# Altium PCB PCB1.PcbDoc (part 1 of 2)
Units mm, origin at the board's own origin, x right, y up, seen from the top; angles counter-clockwise.
Board outline 100 x 24 mm, 2 copper layers (Top Layer, Bottom Layer); 70 components, 86 nets, 352 pads, 196 vias.
Unrouted connection lines stored in the file: 3.
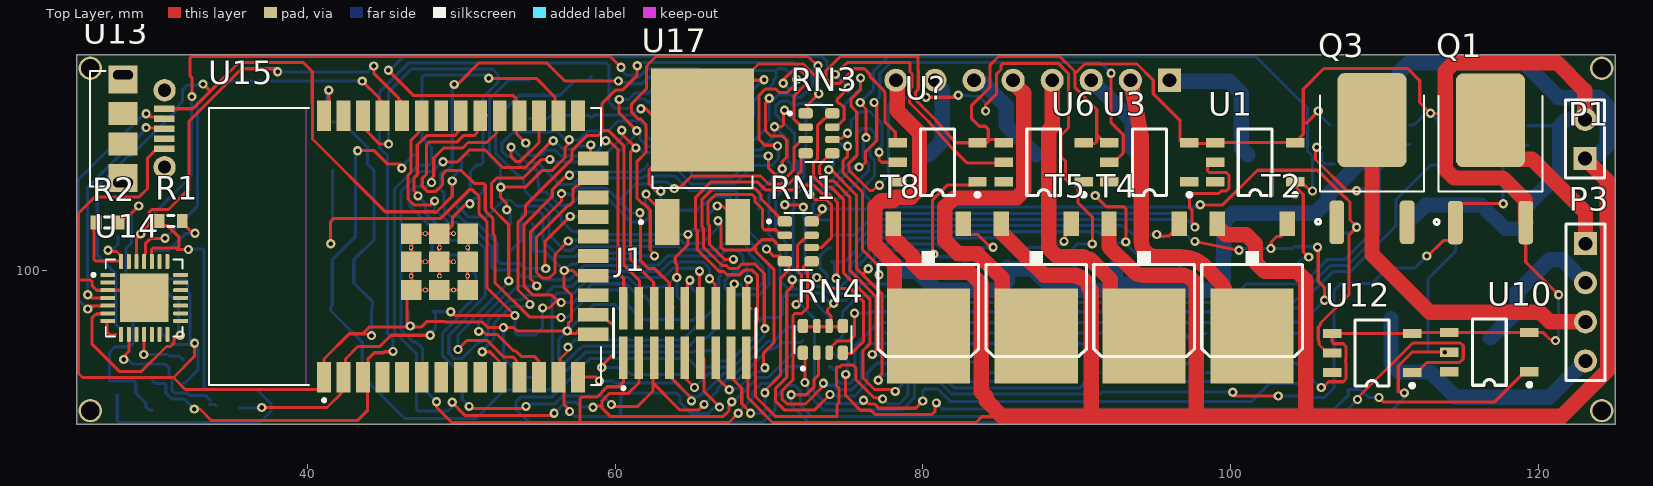
[diagram p0: Top Layer view]
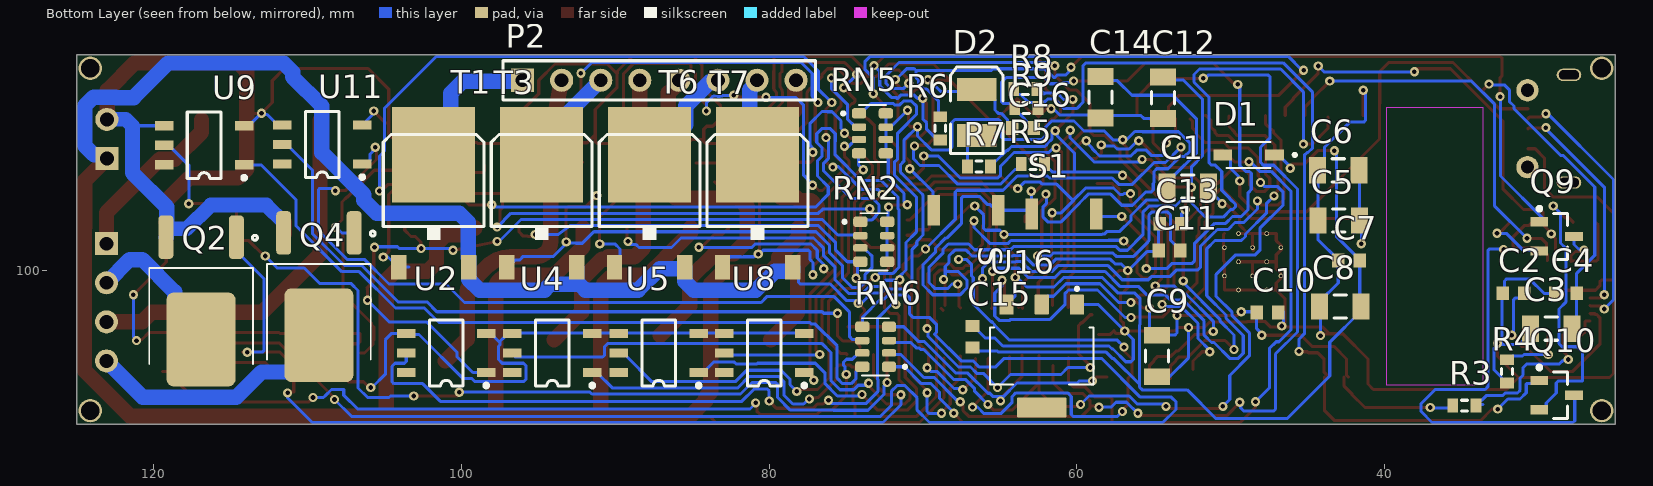
[diagram p1: Bottom Layer view, seen from below]

## Layer stack, top to bottom
Top Solder: solder mask 0.0102, Solder Resist, Dk 3.5
Top Layer: signal copper 0.0356
Dielectric 1: dielectric 0.32, FR-4, Dk 4.8
Bottom Layer: signal copper 0.0356
Bottom Solder: solder mask 0.0102, Solder Resist, Dk 3.5

## Board outline
25,114 125,114 125,90 25,90

## Design rules (kind name [scope] priority, off if disabled: settings)
Clearance [All] p1: gap=0.2 ignorepadtopadclearanceinfootprint=FALSE
PolygonConnect [All] p1: connectstyle=Relief reliefconductorwidth=0.254 reliefentries=4 polygonreliefangle="90 Angle" airgapwidth=0.254
RoomDefinition SheetArduinoUSB [InComponentClass('SheetArduinoUSB')] p1: confinementstyle=ConfineIn formatcopy=TRUE lockcomponents=FALSE outline 126,165 192,165 192,180 126,180
RoomDefinition SheetArduinoPNP [InComponentClass('SheetArduinoPNP')] p2: confinementstyle=ConfineIn formatcopy=TRUE lockcomponents=FALSE outline 126,133 263,133 263,164 126,164
RoomDefinition SheetArduinoNPN [InComponentClass('SheetArduinoNPN')] p3: confinementstyle=ConfineIn formatcopy=TRUE lockcomponents=FALSE outline 126,123 269,123 269,164 126,164
RoomDefinition SheetArduinoESP32 [InComponentClass('SheetArduinoESP32')] p4: confinementstyle=ConfineIn formatcopy=TRUE lockcomponents=FALSE outline 126,92 273,92 273,123 126,123
RoutingCorners [All] p1: cornerstyle=45-Degree minsetback=2 maxsetback=2
RoutingVias [All] p1: holewidth=0.3 width=0.6 viastyle="Through Hole" minholewidth=0.3 minwidth=0.6 maxholewidth=0.711 maxwidth=1.27
SMDNeckDown [All] p1: percent=100.000
SolderMaskExpansion [All] p1: expansion=0.102 istentingtop=FALSE
Width [All] p1: maxlimit=1 minlimit=0.2 preferedwidth=0.2 minimp=50.000000 maximp=50.000000 favimp=50.000000
29 further rules are at their usual default settings.

## Classes and differential pairs
component class SheetArduinoUSB: C1 C2 C3 C4 D1 Q9 Q10 R1 R2 R3 R4 U13 U14
component class SheetArduinoPNP: P1 P2 RN1 RN2 RN3 RN5 T1 T2 T3 T4 T5 T6 T7 T8 U1 U2 U3 U4 U5 U6 U8 U?
component class SheetArduinoNPN: P3 Q1 Q2 Q3 Q4 RN4 RN6 U9 U10 U11 U12
component class SheetArduinoESP32: C5 C6 C7 C8 C9 C10 C11 C12 C13 C14 C16 D2 J1 R5 R6 R7 R8 R9 S S1 U15 U16 U17

## Components (designator, comment, footprint, x,y, rotation, side; value= is the part's Value field where it differs from the comment)
C1 "10uF" C1206 52.775,105.45 r0 bottom
C2 "1uF" 1608[0603] 31.6,98.5 r180 bottom
C3 "10uF" C1206 29.15,96.2 r180 bottom
C4 "0.1uF" 1608[0603] 28.2,98.5 r180 bottom
C5 "10uF" C1206 42.975,103.225 r180 bottom
C6 "10uF" C1206 43,106.5 r180 bottom
C7 "0.1uF" 1608[0603] 42.3,100.625 r180 bottom
C8 "10uF" C1206 42.875,97.65 r180 bottom
C9 "10uF" C1206 54.775,94.425 r90 bottom
C10 "0.1uF" 1608[0603] 47.6,97.25 r0 bottom
C11 "0.1uF" 1608[0603] 53.975,101.275 r180 bottom
C12 "10uF" C1206 54.4,111.225 r90 bottom
C13 "0.1uF" 1608[0603] 53.9,103.025 r180 bottom
C14 "10uF" C1206 58.45,111.25 r90 bottom
C15 "0.1uF" 1608[0603] 66.775,95.675 r270 bottom
C16 "0.1uF" 1608[0603] 63.5,109.25 r180 bottom
D1 "1N5819HW-7" SOD3715X145N 48.825,107.5 r0 bottom
D2 "LED" 3.5X2.8X1.9 66.5,110.25 r90 bottom
J1 "FTM-109-02-L-DV" SAMTEC_FTM-109-02-L-DV 64.525,95.917 r0 top
P1 "Header 8" HDR1X2 123.05,107.265 r90 top
P2 "Header 2" HDR1X8 96.025,112.35 r180 bottom
P3 "Header 8" HDR1X4 123.075,101.725 r270 top
Q1 "IRLR120N" DPAK229P990X239-3N 116.9,107.24 r0 top
Q2 "IRLR120N" DPAK229P990X239-3N 116.925,98.01 r0 bottom
Q3 "IRLR120N" DPAK229P990X239-3N 109.194,107.252 r0 top
Q4 "IRLR120N" DPAK229P990X239-3N 109.265,98.285 r0 bottom
Q9 "2SC4213" SOT-23B_N 28.8,102.2 r180 bottom
Q10 "2SC4213" SOT-23B_N 28.8,91.875 r180 bottom
R1 "12K" J1-0603 31.1,103.2 r0 top
R2 "12K" J1-0603 27,103.1 r0 top
R3 "2K" J1-0603 34.8,91.2 r0 bottom
R4 "10K" J1-0603 32.025,93.425 r90 bottom
R5 "12K" J1-0603 62.85,106.9 r180 bottom
R6 "12K" J1-0603 68.875,109.225 r90 bottom
R7 "10K" J1-0603 66.35,106.75 r180 bottom
R8 "12K" J1-0603 63.35,111.775 r180 bottom
R9 "12K" J1-0603 63.275,110.55 r180 bottom
RN1 "EXB-38V330GV" RESCAXS80P320X160X60-8N 71.895,101.875 r0 top
RN2 "EXB-38V330GV" RESCAXS80P320X160X60-8N 73.195,101.85 r180 bottom
RN3 "EXB-38V330GV" RESCAXS80P320X160X60-8N 73.245,108.9 r0 top
RN4 "EXB-38V330GV" RESCAXS80P320X160X60-8N 73.5,95.505 r90 top
RN5 "EXB-38V330GV" RESCAXS80P320X160X60-8N 73.28,108.9 r180 bottom
RN6 "EXB-38V330GV" RESCAXS80P320X160X60-8N 73.07,95.025 r0 bottom
S "SKRKAEE010" SKRK 67.2,103.9 r0 bottom
S1 "SKRKAEE010" SKRK 60.825,103.65 r180 bottom
T1 "IRFR5305" D-PAK_TO252AA 101.805,105 r180 bottom
T2 "IRFR5305" D-PAK_TO252AA 101.405,98.225 r180 top
T3 "IRFR5305" D-PAK_TO252AA 94.783,105 r180 bottom
T4 "IRFR5305" D-PAK_TO252AA 94.38,98.225 r180 top
T5 "IRFR5305" D-PAK_TO252AA 87.367,98.225 r180 top
T6 "IRFR5305" D-PAK_TO252AA 87.767,105 r180 bottom
T7 "IRFR5305" D-PAK_TO252AA 80.75,105 r180 bottom
T8 "IRFR5305" D-PAK_TO252AA 80.35,98.225 r180 top
U1 "4N25" SOP5(6) 101.6,107.02 r90 top
U2 "4N25" SOP5(6) 100.99,94.625 r90 bottom
U3 "4N25" SOP5(6) 94.725,107.02 r90 top
U4 "4N25" SOP5(6) 94.095,94.625 r90 bottom
U5 "4N25" SOP5(6) 87.175,94.625 r90 bottom
U6 "4N25" SOP5(6) 87.85,107.02 r90 top
U8 "4N25" SOP5(6) 80.315,94.625 r90 bottom
U9 "4N25" SOP5(6) 116.725,108.125 r90 bottom
U10 "4N25" SOP5(6) 116.825,94.675 r90 top
U11 "4N25" SOP5(6) 109.05,108.175 r90 bottom
U12 "4N25" SOP5(6) 109.2,94.62 r90 top
U13 "105017-0001" MOLEX_105017-0001 28,109.2 r270 top
U14 "CP2102-GM" QFN50P500X500X100-29N 29.375,98.2 r0 top
U15 "ESP32-WROOM-32" MODULE_ESP32-WROOM-32 46.325,101.55 r90 top
U16 "AMS1117-3.3" SOT229P700X180-4N 62.275,94.42 r0 bottom
U17 "L78M05CDT" VREG_L78M05CDT 65.675,107.375 r90 top
U? "4N25" SOP5(6) 80.95,107.02 r90 top

## Footprints (in the part's own frame and the unit in brackets; to place one, negate y for a bottom-side part, rotate by r counter-clockwise, add the part's x,y. Pads: shape width x height; smd on the part's side, far side on the other; paste and mask are expansions set on the pad)
3.5X2.8X1.9 [mm] "SM LED; 2 C-Bend Leads; Body 3.5 x 2.8 x 1.9 mm, inc leads (LxWxH typ)"
  rect 1.5x2.6 smd: 1(-1.5,0) 2(1.5,0)
  silkscreen extent -2.65,-1.7 2.95,1.7
1608[0603] [mm] "Chip Capacitor, Body 1.6x0.8mm, IPC High Density"
  rect 0.8x0.9 smd: 1(-0.7,0) 2(0.7,0)
  body extent -0.87,-0.48 0.87,0.48, height 1.3
C1206 [mm] "Chip Capacitor, Body 3.2x1.6mm, IPC High Density"
  rect 1.1x1.7 smd: 1(-1.35,0) 2(1.35,0)
  silkscreen extent -0.4,-0.75 0.4,0.75, body extent -1.7,-0.9 1.7,0.9, height 1.3
D-PAK_TO252AA [mm]
  rect 1x1.6 smd: 1(-2.28,-4.8) 3(2.28,-4.8)
  rect 5.4x6.2 smd: 4(0,2.5)
  silkscreen extent -3.27,-3.02 3.28,3.82
DPAK229P990X239-3N [mm]
  rrect50% 0.97x2.83 smd: 1(-2.29,-4.14) 2(2.29,-4.14)
  rrect20% 4.49x6.1 smd paste-4: 3(0,2.51)
  silkscreen extent -3.66,-4.26 3.37,4.1
HDR1X2 [mm] "Connector; Header; 2 Position"
  rect 1.5x1.5 hole 0.9: 1(0,0)
  round 1.5 hole 0.9: 2(2.54,0)
  silkscreen extent -1.27,-1.27 3.81,1.27
HDR1X4 [mm] "Connector; Header; 4 Position"
  rect 1.5x1.5 hole 0.9: 1(0,0)
  round 1.5 hole 0.9: 2(2.54,0) 3(5.08,0) 4(7.62,0)
  silkscreen extent -1.27,-1.27 8.89,1.27
HDR1X8 [mm] "Connector; Header; 8 Position"
  rect 1.5x1.5 hole 0.9: 1(0,0)
  round 1.5 hole 0.9: 2(2.54,0) 3(5.08,0) 4(7.62,0) 5(10.16,0) 6(12.7,0) 7(15.24,0) 8(17.78,0)
  silkscreen extent -1.27,-1.27 19.05,1.27
J1-0603 [mm] "Chip Resistor, Body 1.6x0.8mm, IPC High Density"
  rect 0.7x0.9 smd: 1(-0.75,0) 2(0.75,0)
  silkscreen extent -0.2,-0.35 0.2,0.35, body extent -0.85,-0.48 0.85,0.48, height 0.9
MODULE_ESP32-WROOM-32 [mm]
  rect 2x0.9 smd: 1(-8.5,5.26) 2(-8.5,3.99) 3(-8.5,2.72) 4(-8.5,1.45) 5(-8.5,0.18) 6(-8.5,-1.09) 7(-8.5,-2.36) 8(-8.5,-3.63) 9(-8.5,-4.9) 10(-8.5,-6.17) 11(-8.5,-7.44) 12(-8.5,-8.71) 13(-8.5,-9.98) 14(-8.5,-11.25) 25(8.5,-11.25) 26(8.5,-9.98) 27(8.5,-8.71) 28(8.5,-7.44) 29(8.5,-6.17) 30(8.5,-4.9) 31(8.5,-3.63) 32(8.5,-2.36) 33(8.5,-1.09) 34(8.5,0.18) 35(8.5,1.45) 36(8.5,2.72) 37(8.5,3.99) 38(8.5,5.26)
  rect 0.9x2 smd: 15(-5.715,-12.25) 16(-4.445,-12.25) 17(-3.175,-12.25) 18(-1.905,-12.25) 19(-0.635,-12.25) 20(0.635,-12.25) 21(1.905,-12.25) 22(3.175,-12.25) 23(4.445,-12.25) 24(5.715,-12.25)
  rect 1.33x1.33 smd: 39_1(-2.835,-0.405) 39_2(-1,-0.405) 39_3(0.835,-0.405) 39_4(-2.835,-2.24) 39_5(-1,-2.24) 39_6(0.835,-2.24) 39_7(-2.835,-4.075) 39_8(-1,-4.075) 39_9(0.835,-4.075)
  round 0.3 hole 0.2: 39_10(-1.917,-0.405) 39_11(-0.082,-0.405) 39_12(-2.835,-1.322) 39_13(-1,-1.322) 39_14(0.835,-1.322) 39_15(-1.917,-2.24) 39_16(-0.082,-2.24) 39_17(-2.835,-3.157) 39_18(-1,-3.157) 39_19(0.835,-3.157) 39_20(-1.917,-4.075) 39_21(-0.082,-4.075)
  Keep-Out Layer region: 9,6.45 -9,6.45 -9,12.75 9,12.75
  Keep-Out Layer region: 9,6.45 -9,6.45 -9,12.75 9,12.75
  silkscreen extent -10.1,-12.75 9,12.75, body extent -9,-12.75 9,12.75, height 3.2
MOLEX_105017-0001 [mm]
  rect 0.4x1.35 smd: 1(-1.3,2.675) 2(-0.65,2.675) 3(0,2.675) 4(0.65,2.675) 5(1.3,2.675)
  round 1.45 hole 0.85: P$1(-2.5,2.7) P$2(2.5,2.7)
  rect 1.5x1.9 smd: P$8(-1,0) P$9(1,0)
  rect 1.8x1.9 smd: P$10(-3.2,0) P$11(3.2,0)
  oval 0.8x1.6 hole 0.6 slot 1.3 at 90 deg: P$12(-3.5,0) P$13(3.5,0)
  silkscreen extent -3.75,-2.15 3.75,-1.15
QFN50P500X500X100-29N [mm]
  rrect50% 0.97x0.26 smd: 1(-2.37,1.5) 2(-2.37,1) 3(-2.37,0.5) 4(-2.37,0) 5(-2.37,-0.5) 6(-2.37,-1) 7(-2.37,-1.5) 15(2.37,-1.5) 16(2.37,-1) 17(2.37,-0.5) 18(2.37,0) 19(2.37,0.5) 20(2.37,1) 21(2.37,1.5)
  rrect50% 0.26x0.97 smd: 8(-1.5,-2.37) 9(-1,-2.37) 10(-0.5,-2.37) 11(0,-2.37) 12(0.5,-2.37) 13(1,-2.37) 14(1.5,-2.37) 22(1.5,2.37) 23(1,2.37) 24(0.5,2.37) 25(0,2.37) 26(-0.5,2.37) 27(-1,2.37) 28(-1.5,2.37)
  rect 3.15x3.15 smd paste-3: 29(0,0)
  silkscreen extent -3.4,-2.5 2.5,2.5
RESCAXS80P320X160X60-8N [mm]
  rrect50% 0.93x0.68 smd: 1(-0.87,1.3) 4(-0.87,-1.3) 5(0.87,-1.3) 8(0.87,1.3)
  rrect50% 0.93x0.48 smd: 2(-0.87,0.4) 3(-0.87,-0.4) 6(0.87,-0.4) 7(0.87,0.4)
  silkscreen extent -2,-1.85 0.88,1.85
SAMTEC_FTM-109-02-L-DV [mm]
  rect 0.56x2.755 smd: 01(-4,-1.608) 02(-4,1.608) 03(-3,-1.608) 04(-3,1.608) 05(-2,-1.608) 06(-2,1.608) 07(-1,-1.608) 08(-1,1.608) 09(0,-1.608) 10(0,1.608) 11(1,-1.608) 12(1,1.608) 13(2,-1.608) 14(2,1.608) 15(3,-1.608) 16(3,1.608) 17(4,-1.608) 18(4,1.608)
  silkscreen extent -4.63,-3.68 4.63,1.59
SKRK [mm]
  rect 0.8x2 smd: 1(-2.1,0) 2(2.1,0)
SOD3715X145N [mm]
  rect 1.21x0.73 smd: A(1.68,0) C(-1.68,0)
  silkscreen extent -3.1,-0.85 1.43,0.85, body extent -1.83,-0.78 1.83,0.78, height 0.8
SOP5(6) [mm] "Small Outline; 6 Leads (1 Absent); Body Width 4.4 mm; Pitch 1.27 mm"
  rect 0.6x1.2 smd: 1(-1.27,-2.6) 3(1.27,-2.6) 4(1.27,2.6) 5(0,2.6) 6(-1.27,2.6)
  silkscreen extent -2.24,-2.72 2.15,1.1
SOT229P700X180-4N [mm]
  rrect15% 0.93x1.31 smd: 1(-2.29,-3.345) 2(0,-3.345) 3(2.29,-3.345)
  rrect15% 3.24x1.31 smd: 4(0,3.345)
  silkscreen extent -3.36,-4.47 3.36,1.86
SOT-23B_N [mm] "SOT23, 3-Leads, Body 2.9x1.3mm, Pitch 0.95mm, Lead Span 2.4mm, IPC Medium Density"
  rect 1.15x0.6 smd: 1(-1.125,0.95) 2(-1.125,-0.95) 3(1.125,0)
  silkscreen extent -1.25,-1.5 0.7,1.92, body extent -0.7,-1.5 0.7,1.5, height 1.14
VREG_L78M05CDT [mm]
  rect 3x1.6 smd: 1(-4.25,2.3) 3(-4.25,-2.3)
  rect 6.7x6.7 smd paste-2.645: 2(2.4,0)
  silkscreen extent -4.35,-3.25 -1.26,4.1

## Part data
C1 C2 C3 C4 C5 C6 C7 C8 C9 C10 C11 C12 C13 C14 C15 C16: library part "Cap Semi", "Capacitor (Semiconductor SIM Model)", LatestRevisionDate=29-May-2009, LatestRevisionNote="IPC-7351 Footprint Added.", PackageDescription="Chip Capacitor", PackageReference=C1206, Published=8-Jun-2000, Publisher="Altium Limited"
D1: "Diode Schottky 40 V 1A Surface Mount SOD-123", Package="SOD-123 Fairchild Semiconductor", Availability="In Stock", Check_prices=https://www.snapeda.com/parts/1N5819HW-7/Diodes+Inc./view-part/?ref=eda, MF="Diodes Inc.", MP=1N5819HW-7, Price=None, Purchase-URL=https://pricing.snapeda.com/search/part/1N5819HW-7/?ref=eda, SnapEDA_Link=https://www.snapeda.com/parts/1N5819HW-7/Diodes+Inc./view-part/?ref=snap
D2: library part LED3, "Typical BLUE SiC LED", DatasheetVersion=16-Apr-2002, LatestRevisionDate=17-Dec-2003, LatestRevisionNote="PCB Footprint replaced.", PackageDescription="SM LED; 2 C-Bend Leads; Body 3.5 x 2.8 x 1.9 mm, inc leads (LxWxH typ)", PackageReference=3.5X2.8X1.9, PackageVersion=16-Apr-2002, Published=8-Jun-2000, Publisher="Altium Limited"
J1: Package=None, Availability=Unavailable, MP=FTM-109-02-L-DV, Price=None
P1: library part "Header 2", "Header, 2-Pin", LatestRevisionDate=17-Jul-2002, LatestRevisionNote="Re-released for DXP Platform.", Publisher="Altium Limited"
P2: library part "Header 8", "Header, 8-Pin", LatestRevisionDate=17-Jul-2002, LatestRevisionNote="Re-released for DXP Platform.", Publisher="Altium Limited"
P3: library part "Header 4", "Header, 4-Pin", LatestRevisionDate=17-Jul-2002, LatestRevisionNote="Re-released for DXP Platform.", Publisher="Altium Limited"
Q1 Q2 Q3 Q4: "N-Channel 100V 10A _Tc_ 48W _Tc_ Surface Mount D-Pak", Package="TO-252 International Rectifier", Availability=Unavailable, MF="Infineon Technologies", MP=IRLR120N, Price=None, SnapEDA_Link=https://www.snapeda.com/parts/IRLR120N/Infineon%20Technologies/view-part/182771/?ref=snap
Q9 Q10: library part QNPN, "NPN Bipolar Transistor", LatestRevisionDate=29-May-2009, LatestRevisionNote="IPC-7351 Footprint Added.", PackageDescription="3-Pin SOT-23 Package 0.95 mm Pitch, 2.4 mm Lead Span", PackageReference=SOT-23B, PackageVersion=Aug-1999, Published=8-Jun-2000, Publisher="Altium Limited"
R1 R2 R3 R4 R5 R6 R7 R8 R9: library part Res3, "Resistor", LatestRevisionDate=29-May-2009, LatestRevisionNote="IPC-7351 Footprint Added.", PackageDescription="Chip Resistor", PackageReference=J1-0603, Published=8-Jun-2000, Publisher="Altium Limited"
RN1 RN2 RN3 RN4 RN5 RN6: "Resistor Array, Chip, 4 elements CONVEX 1206 2%", Package="0603 Panasonic", Availability=Bad, Check_prices=https://www.snapeda.com/parts/EXB-38V330GV/Panasonic/view-part/1421932/?ref=eda, MF=Panasonic, MP=EXB-38V330GV, Price=None, SnapEDA_Link=https://www.snapeda.com/parts/EXB-38V330GV/Panasonic/view-part/1421932/?ref=snap
S S1: "Switch Tactile N.O. SPST Round Button Gull Wing 0.05A 12VDC 1.57N SMD T/R", Package=None, Availability=Unavailable, MF=ALPS, MP=SKRKAEE010, Price=None, SnapEDA_Link=https://www.snapeda.com/parts/SKRKAEE010/ALPS/view-part/380772/?ref=snap
T1 T2 T3 T4 T5 T6 T7 T8: "P-Channel 55V 31A _Tc_ 110W _Tc_ Surface Mount D-Pak", Package="TO-252-3 Infineon Technologies", Availability=Unavailable, MF="Infineon Technologies", MP=IRFR5305, Price=None, SnapEDA_Link=https://www.snapeda.com/parts/IRFR5305/Infineon%20Technologies/view-part/2877715/?ref=snap
U1 U2 U3 U4 U5 U6 U8 U9 U10 U11 U12 U?: library part Optoisolator2, "5 Pin Mini Flat Pack Optocoupler", DatasheetVersion=Apr-2004, LatestRevisionDate=04-Mar-2005, LatestRevisionNote="PCB Footprint replaced, Sch pins re-numbered.", PackageDescription="Small Outline; 6 Leads (1 Absent); Body Width 4.4 mm; Pitch 1.27 mm", PackageReference=SOP5(6), Published=24-Mar-1999, Publisher="Altium Limited"
U13: "USB - micro B USB 2.0 Receptacle Connector 5 Position Surface Mount, Right Angle; Through Hole", Package=None, Availability=Unavailable, MF=Molex, MP=105017-0001, Price=None, SnapEDA_Link=https://www.snapeda.com/parts/105017-0001/Molex/view-part/281210/?ref=snap
U14: "USB Bridge, USB to UART USB 2.0 UART Interface 28-QFN _5x5_", Package="QFN-28 Silicon Labs", Availability=Unavailable, MF="Silicon Labs", MP=CP2102-GM, Price=None, SnapEDA_Link=https://www.snapeda.com/parts/CP2102-GM/Silicon%20Labs/view-part/135876/?ref=snap
U15: "Bluetooth, WiFi 802.11b/g/n, Bluetooth v4.2 +EDR, Class 1, 2 and 3 Transceiver Module 2.4GHz ~ 2.5GHz Antenna Not Included, U.FL Surface Mount", Package="Module Espressif Systems", Check_prices=https://www.snapeda.com/parts/ESP32-WROOM-32/Espressif+Systems/view-part/?ref=eda, Digi-Key_Part_Number=1965-ESP32-WROOM-32U-N4CT-ND, MF="Espressif Systems", MP=ESP32-WROOM-32, Purchase-URL=https://pricing.snapeda.com/search/part/ESP32-WROOM-32/?ref=eda, SnapEDA_Link=https://www.snapeda.com/parts/ESP32-WROOM-32/Espressif+Systems/view-part/?ref=snap
U16: "Sot223/Pkg 1-Amp 3.3-Volt Low Drop Out Voltage Regulatator", Package=None, Availability=Unavailable, MF="Advanced Monolithic Systems", MP=AMS1117-3.3, Price=None, SnapEDA_Link=https://www.snapeda.com/parts/AMS1117-3.3/Advanced%20Monolithic%20Systems/view-part/53450/?ref=snap
U17: "7805 based precision 5V fixed regulator with output current of up to 500mA and wide temperature operating range of 0Â°C to 150Â°C.", Package="TO-252-3 STMicroelectronics", Availability="In Stock", Check_prices=https://www.snapeda.com/parts/L78M05CDT/STMicroelectronics/view-part/?ref=eda, MF=STMicroelectronics, MP=L78M05CDT, Price=None, SnapEDA_Link=https://www.snapeda.com/parts/L78M05CDT/STMicroelectronics/view-part/?ref=snap

## Free pads (board coordinates)
  round 1.524 hole 1.2: 9(124.125,90.875) 10(124.125,113.125) 11(25.875,113.125) 13(25.875,90.875)

## Via types
v1: diameter 0.6, hole 0.3, Top Layer to Bottom Layer, 196 vias

## Nets (pads, with @x,y where several pads share a name; then routed paths per layer and width w, separated by ;. In a path a pad name is that pad's centre, name@x,y a point inside that pad or via, vN(x,y) a via of type N, cw(c..) or ccw(c..) an arc to the next point about the centre after c; other vN are vias at no path point)
+3.3V: C5.2 C6.2 C9.2 C10.2 R3.2 R5.2 R7.2 R8.2 U15.2 U16.2 | length 90.8
  Top Layer w0.2: v1(37.025,91.075) 41.264,91.075 42.115,91.926 42.115,91.98 42.635,92.5 U15.2@42.635,93.05 ; v1(41.5,101.725) 41.5,102.975 41.483,102.992 41.483,103.158 41.675,103.35 48.625,103.35 50.517,105.242 50.706,105.242 51.15,104.799 51.15,103.676 51.476,103.35 51.489,103.35 51.665,103.174 51.665,98.867 v1(53.478,97.055) 49.545,97.055 v1(49.3,97.3) ; U15.2@42.335,93.05 42.458,93.173 42.458,94.233 43.262,95.037 44.687,95.037 45.425,95.775 v1(47.975,95.775) ; v1(55.275,97.55) 55.702,97.55 56.209,98.057 ; v1(56.478,97.905) 56.325,98.057 56.209,98.057 ; v1(57.028,106.18) 56.854,106.18 55.903,105.229 55.903,104.789 54.078,102.964 54.078,98.956 54.654,98.38 55.886,98.38 56.209,98.057 ; v1(60.253,111.105) 60.253,110.225 v1(61.403,109.075)
  Bottom Layer w0.2: R3.2@35.575,91.05 37,91.05 v1(37.025,91.075) ; v1(41.5,101.725) 41.5,103.1 C5.2@41.625,103.225 41.625,106.475 C6.2@41.65,106.5 ; v1(47.975,95.775) 47.975,95.875 48.3,96.2 C10.2@48.3,97.25 ; C10.2@48.129,97.3 v1(49.3,97.3) ; v1(53.478,97.055) 53.478,95.917 53.595,95.8 54.75,95.8 C9.2@54.775,95.775 55.275,96.275 v1(55.275,97.55) ; v1(56.478,97.905) 57.263,97.905 57.268,97.9 58.488,99.12 60.699,99.12 61.51,98.309 61.91,98.309 62.275,97.944 U16.2@62.275,97.765 ; v1(57.028,106.18) 57.088,106.18 57.308,106.4 60.15,106.4 ; v1(60.253,111.105) 60.855,111.105 61.271,111.521 62.064,111.521 62.12,111.466 R8.2@62.359,111.705 ; v1@61.285,108.83 61.285,108.746 60.15,107.611 60.15,106.4 ; v1@61.595,108.958 61.595,108.551 61.943,108.204 61.943,108.167 62.06,108.05 64.24,108.05 64.515,107.775 64.575,107.775 65.25,107.1 65.35,107.1 65.6,106.85 R7.2@65.6,106.75 ; R5.2@62.1,106.9 62.1,106.8 61.85,106.55 61.75,106.55 61.6,106.4 60.15,106.4
+12: C12.2 C13.2 J1.17 P1.1 RN2.5 RN2.6 RN2.7 RN2.8 RN4.5 RN4.6 RN4.7 RN4.8 RN5.5 RN5.6 RN5.7 RN5.8 T1.3 T2.3 T3.3 T4.3 T5.3 T6.3 T7.3 T8.3 U17.1 | length 305.5
  Top Layer w0.2: v1(52.953,103.93) 52.924,103.958 52.924,104.351 52.55,104.725 v1(52.55,105.4) 54.146,105.4 55.221,106.475 55.871,106.475 56.728,107.332 56.728,107.982 57.003,108.257 v1(57.003,108.48) ; v1(62.003,104.95) 62.003,104.847 63.375,103.475 U17.1@63.375,103.125 ; J1.17@68.625,94.283 68.625,91.719 69.044,91.3 69.395,90.949 69.395,90.924 70.219,90.1 70.662,90.1 79.5,90.1 83.45,90.1 83.825,90.475 85.177,90.475 ; v1(70.353,109.33) 70.808,109.33 70.925,109.447 70.925,110.219 71.003,110.297 v1(71.003,110.405) ; v1(71.025,104.25) 72.084,104.25 v1(72.229,104.105) ; RN4.8@72.333,96.325 RN4.6@74.025,96.325 ; v1(74.204,97.855) 73.797,97.448 73.797,97.264 74.025,97.036 RN4.6@74.025,96.325 ; RN4.5@74.862,96.325 RN4.6@74.025,96.325
  Top Layer w1: T8.3@78.07,102.775 78.07,102.157 79.375,100.852 79.375,100.447 79.961,99.861 83.064,99.861 83.792,99.133 83.792,92.085 84.125,91.752 84.125,91.527 85.152,90.5 ; T5.3@85.087,102.775 85.087,102.475 86.675,100.887 86.675,100.868 87.869,99.675 89.969,99.675 90.119,99.525 90.357,99.525 90.767,99.115 90.767,98.877 90.95,98.694 90.95,90.525 ; 85.177,90.475 85.152,90.5 ; T4.3@92.1,102.775 92.1,101.524 93.656,99.968 ccw(c94.363,100.675) 94.363,99.675 96.78,99.675 cw(c96.78,98.675) 97.382,99.474 97.499,99.386 cw(c97.08,98.825) 97.78,98.825 97.78,90.755 97.525,90.5 ; T2.3@99.125,102.775 99.125,102.725 99.286,102.725 99.711,102.3 101.039,102.3 101.625,101.714 101.625,100.511 102.211,99.925 104.314,99.925 104.9,99.339 104.9,90.525 104.95,90.475 ; P1.1@123.05,107.265 124.5,105.815 124.5,102.79 124.525,102.765 124.525,93.504 121.521,90.5 104.95,90.5 97.525,90.5 ; 85.152,90.5 90.925,90.5 90.95,90.525 ; 90.95,90.525 90.975,90.5 97.525,90.5
  Bottom Layer w0.2: v1(52.55,105.4) 52.55,106.703 51.828,107.425 51.828,111.116 53.086,112.375 C12.2@54.4,112.375 ; C13.2@53.175,103.05 53.175,103.683 ; v1@56.799,108.45 56.224,109.025 55.726,109.025 55.707,109.005 53.379,109.005 52.628,108.254 52.628,107.757 52.984,107.4 53.267,107.4 54.067,106.6 54.799,106.6 54.975,106.424 54.975,105.692 55.025,105.642 55.025,105.217 55.142,105.1 55.496,105.1 56.371,104.225 57.074,104.225 57.799,104.95 59.249,104.95 59.825,104.374 59.825,104.35 61.045,103.13 61.852,103.13 62.203,103.482 62.203,104.097 61.975,104.325 61.975,104.922 v1(62.003,104.95) ; v1(57.003,108.48) 57.639,108.48 58.209,109.05 59.526,109.05 60.176,109.7 61.627,109.7 62.018,109.309 62.018,108.758 62.276,108.5 64.724,108.5 64.9,108.676 64.9,109.624 65.076,109.8 67.924,109.8 68.125,109.599 68.125,108.001 68.301,107.825 69.449,107.825 70.353,108.729 v1(70.353,109.33) 71.238,108.446 71.238,107.076 71.453,106.861 71.453,106.44 cw(c71.253,106.44) 71.395,106.298 70.059,104.962 ccw(c70.2,104.82) 70,104.82 70,102.3 69.994,102.294 70.343,101.933 cw(c70.2,101.794) 70.4,101.794 70.4,101.657 70.7,101.357 70.7,99.335 71.255,98.78 72.439,98.78 72.689,98.53 73.319,98.53 73.994,97.855 v1(74.204,97.855) 74.204,98.021 74.2,98.025 74.958,98.025 76.033,99.1 77.975,99.1 78.092,99.217 78.092,99.897 T7.3@78.395,100.2 ; v1(71.003,110.405) RN5.7@72.1,109.309 ; v1(71.025,104.25) 71.229,104.454 71.229,104.997 72.253,106.022 72.253,107.443 RN5.5@72.41,107.6 RN5.6@72.41,108.5 RN5.7@72.41,109.3 RN5.8@72.41,110.2 ; v1(72.229,104.105) 72.165,104.105 72.16,104.1 72.277,103.983 72.277,103.198 RN2.8@72.325,103.15 RN2.7@72.325,102.25 RN2.6@72.325,101.45 RN2.5@72.325,100.55
  Bottom Layer w1: T7.3@78.47,100.2 78.47,99.929 79.621,99.929 80.85,98.7 84.901,98.7 85.487,99.286 T6.3@85.487,100.1 ; T6.3@85.487,100.2 T6.3@85.487,100.1 ; 92.503,99.1 94.195,99.1 94.595,98.7 98.825,98.7 99.525,99.4 T1.3@99.525,100.2 99.525,100.793 99.55,100.818 99.55,103.114 100.136,103.7 105.502,103.7 106.342,104.54 106.342,104.907 109.077,107.642 109.077,110.679 110.975,112.577 110.975,112.889 111.561,113.475 119.064,113.475 121.314,111.225 122.444,111.225 122.474,111.255 123.914,111.255 124.5,110.669 124.5,108.111 123.914,107.525 123.886,107.525 123.876,107.515 P1.1@123.056,107.515 ; T3.3@92.503,100.2 92.503,99.253 92.35,99.1 91.95,98.7 88.507,98.7 87.107,100.1 T6.3@85.487,100.1
EXT+5V: C1.2 C7.2 C8.2 C14.2 C15.2 D1.C U16.3 U17.3 | length 98.1
  Top Layer w0.2: v1(43.25,107.775) 44.342,107.775 45.217,106.9 46.008,106.9 46.008,106.85 46.125,106.733 v1(46.125,106.625) ; v1(64.003,99.53) 64.003,100.366 63.9,100.469 63.9,100.825 64.728,101.653 v1(64.728,102.33) ; v1(66.625,104.175) 66.973,104.175 U17.3@68.2,102.948
  Bottom Layer w0.2: v1(43.25,107.775) 43.242,107.775 43.125,107.658 43.125,102.2 41.6,100.675 C7.2@41.6,100.625 41.6,97.725 C8.2@41.525,97.65 41.525,97.35 43.55,95.325 43.55,93.125 46.3,90.375 50.975,90.375 52.825,92.225 55.749,92.225 55.925,92.401 55.925,92.591 ; v1(46.125,106.625) 46.125,106.72 46.905,107.5 D1.C@47.145,107.5 ; C1.2@54.025,105.625 54.025,105.85 53.675,106.2 53.619,106.2 52.228,107.591 52.228,109.853 53.75,111.375 56.408,111.375 57.358,112.325 C14.2@58.175,112.325 ; C1.2@54.125,105.45 54.125,105.15 54.7,104.575 55.456,104.575 56.475,103.556 56.475,103.251 57.201,102.525 58.026,102.525 58.201,102.35 58.33,102.35 58.35,102.33 v1(64.728,102.33) ; C14.2@58.45,112.6 C14.2@58.175,112.325 ; C14.2@59.125,112.325 C14.2@58.175,112.325 ; v1(64.003,99.53) 63.864,99.53 63.239,98.905 61.48,98.905 60.865,99.52 58.322,99.52 57.332,98.53 56.254,98.53 55.875,98.151 55.875,96.499 55.925,96.449 55.925,92.591 ; v1@64.006,99.522 64.006,98.324 U16.3@64.565,97.765 ; v1@64.827,102.432 64.995,102.6 65.933,102.6 66.05,102.717 66.05,103.6 v1(66.625,104.175) ; C15.2@66.775,94.975 66.55,94.75 65.15,94.75 65.075,94.675 58.088,94.675 57.663,94.25 57.584,94.25 55.925,92.591
GND: C1.1 C2.1 C3.1 C4.1 C5.1 C6.1 C7.1 C8.1 C9.1 C10.1 C11.1 C12.1 C13.1 C14.1 C15.1 C16.1 D2.2 J1.18 P1.2 Q1.2 Q2.2 Q3.2 Q4.2 R4.1 S1.1 S.1 U1.3 U1.4 U2.3 U2.4 U3.3 U3.4 U4.3 U4.4 U5.3 U5.4 U6.3 U6.4 U8.3 U8.4 U9.3 U9.4 U10.3 U10.4 U11.3 U11.4 U12.3 U12.4 U13.5 U14.3 U14.29 U15.1 U15.15 U15.38 U15.39_1 U15.39_2 U15.39_3 U15.39_4 U15.39_5 U15.39_6 U15.39_7 U15.39_8 U15.39_9 U15.39_10 U15.39_11 U15.39_12 U15.39_13 U15.39_14 U15.39_15 U15.39_16 U15.39_17 U15.39_18 U15.39_19 U15.39_20 U15.39_21 U16.1 U17.2 U?.3 U?.4 | length 429
  Top Layer w0.2: U14.29@29,98.2 28.5,98.7 U14.3@27.005,98.7 26.279,98.7 25.995,98.984 25.995,99.25 25.878,99.367 25.1,99.367 ; U13.5@30.675,107.9 30.2,107.9 29.587,107.287 29.587,105.313 29.049,104.775 26.175,104.775 25.1,103.7 25.1,99.367 ; v1(32.65,95.25) 32.65,94.4 31.275,93.025 ; U15.38@41.365,110.05 41.375,110.06 v1(41.375,111.696) ; 43.53,95.87 42.7,95.87 41.065,94.235 U15.1@41.065,93.05 41.065,92.6 40.715,92.25 32.05,92.25 31.275,93.025 ; v1(44.15,95.75) 44.05,95.85 43.55,95.85 44,96.3 46.6,96.3 v1@46.638,96.338 ; v1(46.675,96.375) v1@46.638,96.338 ; 48.525,101.269 48.525,101.468 48.565,101.507 U15.39_6@48.565,102.385 ; U15.39_15@48.565,99.668 U15.39_5@48.565,100.55 ; U15.39_18@49.482,100.55 U15.39_5@48.565,100.55 ; U15.39_19@49.482,102.385 U15.39_6@48.865,102.385 ; U15.39_9@50.4,102.385 50.45,102.335 50.45,100.6 U15.39_8@50.4,100.55 U15.39_20@50.4,99.633 U15.39_7@50.4,98.715 U15.39_17@49.482,98.715 U15.39_4@48.565,98.715 U15.39_12@47.647,98.715 U15.39_1@47.03,98.715 ; v1(50.55,104.318) 50.512,104.357 50.346,104.357 49.43,103.441 49.43,102.95 U15.39_6@48.865,102.385 ; v1@56.7,96.05 53.619,96.05 53.39,96.28 v1(52.728,96.28) 51.712,96.28 51.352,96.639 48.936,96.639 48.9,96.675 47.767,96.675 47.392,96.3 46.675,96.3 v1@46.638,96.338 ; v1@56.875,95.875 57.425,95.875 U15.15@57.6,96.05 ; v1(56.875,96.05) 56.952,96.127 56.952,96.553 57.15,96.751 57.15,98.387 56.678,98.859 v1(56.678,99.98) 57.237,99.98 57.575,99.642 ; U15.15@57.575,96.075 U15.15@57.6,96.05 ; U15.15@58.575,95.835 57.815,95.835 U15.15@57.6,96.05 ; v1(61.668,110.503) 61.685,110.521 61.943,110.521 62.489,109.975 62.845,110.33 62.95,110.225 63.875,111.15 65.35,109.675 62.2,106.525 62.2,105.602 62.672,105.13 v1(62.953,105.13) ; U17.2@65.675,109.775 68.25,112.35 69.642,112.35 v1(69.675,112.383) ; U17.2@68.262,112.362 69.28,113.38 69.28,113.405 72.218,113.405 73.023,112.6 73.704,112.6 ; J1.18@68.575,97.699 68.575,99.326 v1(68.653,99.405) ; J1.18@68.688,97.387 68.825,97.525 ; 77.334,111.816 76.609,112.541 cw(c76.75,112.683) 76.55,112.683 76.55,112.749 76.199,113.1 75.522,113.1 74.552,112.131 74.055,112.131 73.704,112.482 73.704,112.6 ; 77.335,111.815 cw(c77.192,111.676) 77.345,111.804 77.348,111.801 cw(c77.196,111.671) 77.363,111.78 ccw(c78.245,112.35) 77.472,111.639 cw(c77.325,111.504) 77.525,111.503 77.525,109.733 ccw(c77.725,109.733) 77.584,109.591 78.2,108.975 U?.4@78.2,108.49 ; 80.731,109.866 cw(c80.588,109.726) 80.739,109.857 82.058,108.358 ccw(c82.208,108.49) 82.208,108.29 U?.3@83.025,108.29 ; 80.731,109.866 79.525,111.072 79.525,111.497 cw(c79.725,111.497) 79.583,111.638 79.636,111.691 ccw(c79.495,111.832) 79.695,111.832 79.695,112.951 79.675,112.971 79.675,113.9 74.625,113.9 73.704,112.979 73.704,112.6 ; U?.3@83.025,108.24 84.133,108.24 84.25,108.357 84.25,108.525 ; U6.4@85.25,108.29 85.05,108.49 84.285,108.49 84.25,108.525 ; 89.855,112.785 89.855,112.951 88.906,113.9 84.909,113.9 84.375,113.366 84.375,111.915 83.15,110.69 83.15,109.876 83.668,109.358 84.057,109.358 84.25,109.165 84.25,108.525 ; U6.3@89.95,108.24 91.183,108.24 91.3,108.357 91.3,108.815 ; U3.4@92.125,108.29 91.825,108.29 91.3,108.815 ; U1.3@104.183,108.308 104.725,108.85 104.725,109.575 ; U1.3@104.2,108.29 104.19,108.3 99.01,108.3 U1.4@99,108.29 98.96,108.25 97.365,108.25 U3.3@97.325,108.29 97.198,108.417 96.7,108.417 96.7,109.751 94.975,111.476 94.975,112.345 93.915,113.405 90.515,113.405 89.895,112.785 89.895,111.855 91.3,110.45 91.3,108.815 ; 104.925,109.563 105.7,110.338 v1(105.7,110.35) ; 104.925,109.575 104.725,109.575 ; v1(105.9,92.373) 105.995,92.373 106.372,92.75 107.324,92.75 107.5,92.926 107.5,94 107.485,94.015 107.485,94.181 107.5,94.196 107.5,95.044 107.324,95.22 106.717,95.22 106.6,95.337 U12.4@106.6,95.89 U12.3@111.8,95.89 111.855,95.945 U10.4@114.225,95.945 U10.3@119.425,95.945 120.325,95.945 120.768,95.502 121.048,95.502 v1(121.125,95.425) ; 113.955,110.2 113.225,110.2 113.195,110.17 113.03,110.17 v1(113,110.2) 112.3,110.9 112.3,112.325 111.513,113.112 106.062,113.112 104.725,111.775 104.725,109.575 ; Q1.2@119.19,103.125 119.19,100.535 v1(121.325,98.4) ; 25.1,99.367 25.1,93.292 25.367,93.025 31.275,93.025 ; v1@46.637,96.338 46.465,96.51 46.465,98.15 U15.39_1@47.03,98.715 ; U15.39_1@47.03,98.715 47.03,99.174 46.725,99.479 46.725,99.786 47.03,100.091 U15.39_2@47.03,100.55 ; U15.39_2@47.03,100.55 47.03,101.009 46.675,101.364 46.675,101.571 47.03,101.926 47.03,102.385 U15.39_14@47.647,102.385 U15.39_6@48.565,102.385 ; U15.39_2@47.03,100.55 U15.39_13@47.647,100.55 U15.39_5@48.565,100.55 ; U15.39_6@48.565,102.385 U15.39_6@48.865,102.385
  Top Layer w0.95: Q3.2@111.484,103.112 111.484,102.385 Q3.2@111.494,102.375
  Top Layer w1: Q1.2@119.19,103.125 119.175,103.14 119.175,104.525 117.7,106 114.541,106 113.955,106.586 113.955,110.2 113.955,112.914 114.541,113.5 121.215,113.5 123.025,111.69 P1.2@123.025,110.54
  Bottom Layer w0.2: C4.1@28.9,98.5 29.626,98.5 30.546,99.421 32.079,99.421 32.196,99.304 32.196,98.604 C2.1@32.3,98.5 32.352,98.448 32.352,95.348 v1@32.525,95.175 ; C3.1@30.5,96.2 30.5,95.9 31.225,95.175 v1@32.525,95.175 ; R4.1@31.925,92.675 R4.1@32.025,92.675 32.875,93.525 32.875,94.933 32.65,95.158 v1(32.65,95.25) 32.575,95.175 v1@32.525,95.175 ; v1(41.375,111.696) 41.342,111.696 41.225,111.579 41.225,109.742 41.342,109.625 42.249,109.625 43.9,107.974 43.9,106.9 44.325,106.475 C5.1@44.325,103.225 44.325,102 43,100.675 C7.1@43,100.625 43,99.175 44.225,97.95 C8.1@44.225,97.65 44.15,97.575 v1(44.15,95.75) ; v1@46.55,96.6 C10.1@46.55,97.3 ; v1(50.55,104.318) 50.55,104.383 50.867,104.7 50.975,104.7 51.425,105.15 C1.1@51.425,105.45 ; v1(52.728,96.28) 52.728,94.318 54.02,93.025 C9.1@54.75,93.025 ; C12.1@54.4,109.875 55.65,109.875 55.825,110.05 58.3,110.05 C14.1@58.45,109.9 58.65,110.1 61.121,110.1 61.524,110.503 v1(61.668,110.503) ; C13.1@54.6,103.025 54.675,102.95 C11.1@54.675,101.275 54.725,101.225 55.409,101.225 56.654,99.98 v1(56.678,99.98) 57.098,100.4 57.505,100.4 57.825,100.72 61.362,100.72 61.752,100.33 62.802,100.33 63.153,100.681 63.444,100.972 64.106,100.972 64.148,100.93 66.814,100.93 67.189,101.305 67.927,101.305 68.3,100.932 68.3,100.495 68.55,100.245 68.55,99.908 ; U16.1@60.28,97.47 U16.1@59.985,97.765 58.59,97.765 v1(56.875,96.05) 56.325,95.5 56.325,94.2 56.475,94.05 56.819,94.05 57.644,94.875 57.7,94.875 57.9,95.075 64.8,95.075 65.325,95.6 65.95,95.6 66.725,96.375 C15.1@66.775,96.375 ; S1.1@62.953,103.95 v1(62.953,105.13) ; S1.1@63.025,103.95 S1.1@63.3,103.95 ; S1.1@63.3,103.9 S.1@65.1,103.9 65.35,103.9 65.35,103.983 65.65,104.283 65.844,104.283 65.844,104.319 66.325,104.8 67.383,104.8 67.5,104.683 67.5,103.031 68.426,102.105 68.508,102.105 69.195,101.418 69.195,101.165 69.998,100.361 69.998,99.036 69.368,98.405 67.58,98.405 67.128,98.856 67.128,99.353 67.683,99.908 68.55,99.908 ; C16.1@64.2,109.25 64.5,109.55 64.5,109.79 64.91,110.2 65.1,110.2 65.317,110.417 65.317,111.1 65.842,111.625 68.85,111.625 69.559,112.334 69.626,112.334 v1(69.675,112.383) ; v1(68.653,99.405) 68.577,99.481 68.577,99.675 68.55,99.702 68.55,99.908 ; U8.3@77.549,95.925 96.695,95.925 96.72,95.9 96.99,95.9 97.195,95.695 97.195,95.68 97.535,95.34 ; U2.3@98.39,95.895 98.09,95.895 97.535,95.34 ; U2.4@103.59,95.825 102.759,95.825 99.884,92.95 99.309,92.95 99.114,92.755 95.971,92.755 95.795,92.931 95.795,93.779 95.971,93.955 97.349,93.955 97.595,94.201 97.595,95.049 97.49,95.154 97.49,95.295 97.535,95.34 ; U2.4@103.59,95.895 104.53,95.895 104.95,95.475 104.95,93.235 105.811,92.373 v1(105.9,92.373) ; v1(105.7,110.35) 105.7,110.195 U11.3@106.45,109.445 ; U11.4@111.65,109.445 111.95,109.445 112.628,110.123 112.923,110.123 v1(113,110.2) 113.02,110.2 113.825,109.395 U9.3@114.125,109.395 ; U9.4@119.325,109.395 121.361,109.395 121.381,109.375 ; v1(121.125,95.425) 121.2,95.5 121.2,95.525 121.325,95.65 v1(121.325,98.4)
  Bottom Layer w0.95: Q4.2@111.54,102.175 111.54,103.105 112.675,104.24 116.31,104.24 117.858,102.692 Q2.2@119.175,102.692 ; 121.381,106.331 121.381,109.375 121.811,109.805 P1.2@123.05,109.805
  Bottom Layer w1: Q2.2@119.19,102.15 119.175,102.165 119.175,102.692 119.175,103.216 119.158,103.233 119.158,104.108 121.381,106.331
NetC2_2: C2.2 U14.6 | length 13.3
  Top Layer w0.2: U14.6@26.63,97.2 26.6,97.17 26.301,97.17 26.301,97.13 26.209,97.13 25.995,96.916 25.995,95.181 27.751,93.425 29.2,93.425 30.82,95.045 31.091,95.045 31.305,95.259 31.305,95.512 31.422,95.629 31.471,95.629 31.617,95.775 v1(31.725,95.775)
  Bottom Layer w0.2: C2.2@30.9,98.5 31.191,98.209 31.483,98.209 31.6,98.091 31.6,96.008 31.725,95.883 v1(31.725,95.775)
NetC11_2: C11.2 R6.1 S.2 | length 56.6
  Top Layer w0.2: v1(62.553,100.93) 62.553,101.038 62.275,101.316 62.275,103.907 61.852,104.33 61.774,104.33 61.403,104.701 61.403,107.056 62.003,107.656 62.003,109.479 61.652,109.83 61.492,109.83 61.05,110.272 61.05,110.825 62.025,111.8 62.025,113.249 62.125,113.349 62.125,113.374 62.651,113.9 72.534,113.9 73.129,113.306 v1(73.179,113.306) ; v1(70.003,111.18) 70.003,111.072 69.753,110.822 69.753,109.082 70.105,108.73 70.852,108.73 71.15,108.432 71.15,107.365 70.853,107.069 v1(70.853,106.605)
  Bottom Layer w0.2: C11.2@53.275,101.275 53.275,101.325 53.9,101.95 53.9,103.599 54.076,103.775 55.124,103.775 55.3,103.599 55.3,101.924 55.375,101.849 55.375,101.825 56.3,100.9 57.439,100.9 57.659,101.12 61.527,101.12 61.718,100.93 v1(62.553,100.93) ; R6.1@68.875,108.475 69.061,108.475 69.753,109.168 69.753,109.579 70.003,109.829 v1(70.003,111.18) 70.364,111.18 70.589,111.405 71.418,111.405 71.669,111.154 71.755,111.24 72.052,111.24 72.804,111.991 72.804,112.93 v1(73.179,113.306) ; S.2@69.275,103.925 69.334,103.984 69.334,105.083 70.853,106.602 v1(70.853,106.605)
NetC16_2: C16.2 R9.1 S1.2 | length 44.6
  Top Layer w0.2: v1(49.527,112.08) 49.604,112.157 49.816,112.157 51.134,113.475 55.55,113.475 56.72,112.305 v1(60.203,112.305) ; v1@55.3,100.02 55.303,100.023 55.315,100.023 55.425,100.133 55.425,101.85 v1(57.075,103.5)
  Bottom Layer w0.2: v1(49.527,112.08) 49.4,111.953 49.4,106.801 49.015,106.416 48.77,106.416 48.652,106.299 48.652,105.246 48.852,105.046 48.852,103.946 49.3,103.498 49.872,103.498 50.32,103.05 51.025,103.05 52.35,101.725 52.35,100.592 52.517,100.425 53.826,100.425 54.146,100.105 v1(55.478,100.105) ; v1(57.075,103.5) 58.575,103.5 S1.2@58.725,103.65 ; v1(60.203,112.305) 60.203,112.205 60.2,112.203 60.906,112.203 60.983,112.125 61.726,112.125 62.126,112.525 64.574,112.525 64.9,112.199 64.9,110.967 64.783,110.85 64.25,110.85 64,110.6 64,110.45 63.4,109.85 63.4,109.825 63.175,109.6 62.7,109.6 C16.2@62.625,109.525
NetD2_1: D2.1 R7.1 | length 2.6
  Bottom Layer w0.2: D2.1@66.25,108.475 67.1,108.475 R7.1@67.1,106.75 R7.1@67.1,106.675
NetJ1_01: J1.01 RN6.1 U15.24 | length 63.8
  Top Layer w0.2: v1(48.375,91.45) 48.375,91.1 49.375,90.1 57.725,90.1 ; v1(48.8,107.05) 49.741,107.05 50.508,107.817 51.549,107.817 52.684,106.683 54.138,106.683 55.88,108.425 v1(55.975,108.425) ; v1(58.4,108.15) 58.4,107.615 58.75,107.265 58.875,107.265 U15.24@59.025,107.265 ; J1.01@60.525,94.31 60.525,92.726 60.224,92.425 59.486,92.425 58.811,91.75 57.813,91.75 57.695,91.633 57.695,90.13 57.725,90.1 ; v1(67.995,90.7) 67.395,90.1 57.725,90.1
  Bottom Layer w0.2: v1(48.375,91.45) 47.475,92.35 47.475,94.908 47.033,95.35 46.851,95.35 46.075,96.126 46.075,105.142 47.358,106.425 48.101,106.425 48.726,107.05 v1(48.8,107.05) ; v1(55.975,108.425) 56.046,108.425 56.591,107.88 57.376,107.88 57.576,108.08 58.33,108.08 v1(58.4,108.15) ; v1(67.995,90.7) 67.995,90.749 68.925,91.678 68.925,92.075 69.48,92.629 70.104,92.629 71.2,93.725 RN6.1@72.2,93.725
NetJ1_02: J1.02 RN3.1 U15.28 | length 63.7
  Top Layer w0.2: v1(45.25,113) 46.9,111.35 53.369,111.35 53.545,111.174 53.545,111.067 53.662,110.95 53.715,110.95 54.025,110.64 54.025,110.14 U15.28@53.895,110.27 ; U15.28@53.765,110.05 53.583,109.868 53.583,108.867 v1(54.175,108.275) ; v1(59.388,108.412) 59.425,108.375 59.639,108.375 60.175,107.839 60.175,103.178 60.175,99.85 60.55,99.475 J1.02@60.55,97.595 ; RN3.1@72.375,110.2 72.525,110.35 72.525,110.775 v1(73.225,111.475)
  Bottom Layer w0.2: v1(45.25,113) 45.35,113 46.256,113.906 73.427,113.906 73.779,113.554 73.779,113.057 73.225,112.503 v1(73.225,111.475) ; v1(54.175,108.275) 54.175,108.15 54.349,107.976 54.349,107.45 55.124,107.45 55.479,107.805 56.1,107.805 56.481,107.425 58.524,107.425 59,107.901 59,107.951 59.388,108.34 v1(59.388,108.412)
NetJ1_03: J1.03 RN6.2 U15.26 | length 67.5
  Top Layer w0.2: v1(49.4,91.425) 49.4,91.401 50.251,90.55 55.875,90.55 v1(56.025,90.7) ; v1(51.772,112.475) 54.853,112.475 56.085,111.243 56.085,111.12 56.075,111.13 U15.26@56.075,110.1 ; v1(58.55,91.1) 58.627,91.177 59.102,91.177 59.15,91.225 ; J1.03@61.55,93.819 61.55,92.703 60.847,92 59.626,92 59.15,91.524 59.15,91.225 ; v1(67.567,91.447) 67.567,91.398 67.395,91.226 67.395,90.873 67.027,90.504 59.672,90.504 59.15,91.026 59.15,91.225
  Bottom Layer w0.2: v1(49.4,91.425) 49.337,91.362 49.337,91.039 49.149,90.85 47.192,90.85 47.075,90.967 47.075,94.561 45.65,95.986 45.65,105.283 47.192,106.825 47.864,106.825 48.05,107.011 48.05,107.989 47.425,108.614 47.425,112.563 47.542,112.68 51.458,112.68 51.664,112.475 v1(51.772,112.475) ; v1(56.025,90.7) 56.041,90.7 56.76,91.419 57.453,91.419 57.772,91.1 v1(58.55,91.1) ; v1(67.567,91.447) 67.644,91.524 67.76,91.524 69.265,93.029 69.939,93.029 71.435,94.526 72.101,94.526 RN6.2@72.2,94.625
NetJ1_04: J1.04 RN3.2 U15.10 | length 59.2
  Top Layer w0.2: v1(51.35,94.7) 51.85,94.7 52.445,94.105 U15.10@52.445,93.55 ; v1(54.453,97.78) 54.453,97.941 53.678,98.716 53.678,103.129 54.178,103.629 54.178,104.216 57.2,107.238 57.2,107.799 58.151,108.75 58.875,108.75 59.15,109.025 59.15,109.075 ; v1(61.425,113.3) 61.425,112.679 60.451,111.705 60.004,111.705 59.15,110.851 59.15,109.075 ; J1.04@61.575,97.713 61.575,99.325 60.575,100.325 60.575,108.005 60.525,108.055 60.525,108.124 59.574,109.075 59.15,109.075 ; v1(70.925,112.15) 70.925,112.376 71.555,113.005 72.052,113.005 72.404,112.654 72.404,112.107 71.61,111.313 71.61,109.835 71.885,109.56 71.897,109.56 71.953,109.504 71.953,109.499 72.153,109.3 RN3.2@72.375,109.3
  Bottom Layer w0.2: v1(51.35,94.7) 51.35,94.8 52.118,95.568 52.118,96.544 53.229,97.655 54.328,97.655 v1(54.453,97.78) ; v1(61.425,113.3) 61.533,113.3 61.733,113.5 71.558,113.5 72.404,112.654 72.404,112.157 72.052,111.805 71.27,111.805 v1(70.925,112.15)
NetJ1_05: J1.05 RN6.3 U15.29 | length 55.1
  Top Layer w0.2: v1@48.016,105.741 v1(48.052,105.705) ; v1@48.027,105.752 48.027,105.952 48.2,106.125 48.2,107.299 48.851,107.95 50.075,107.95 50.425,108.3 51.649,108.3 52.275,108.926 52.275,109.033 52.464,109.222 52.464,109.669 U15.29@52.622,109.828 ; v1(50.5,91.15) 50.617,91.033 50.617,91.025 53.883,91.025 53.931,91.073 54.123,91.073 v1(54.2,91.15) ; v1(59.75,91.275) 59.75,91.267 59.867,91.15 61.451,91.15 62.45,92.149 62.45,92.65 ; J1.05@62.45,94.468 62.45,92.65 ; v1(65.775,91.276) 65.403,90.904 64.206,90.904 62.461,92.65 62.45,92.65
  Bottom Layer w0.2: v1(48.052,105.705) 47.777,105.43 46.929,105.43 46.577,105.079 46.577,104.241 48.097,102.721 48.097,101.299 48.396,101 49.669,101 50.935,99.734 50.935,98.296 49.9,97.261 49.9,97.051 48.775,95.926 48.775,94.436 50.05,93.161 50.05,91.6 v1(50.5,91.15) ; v1(54.2,91.15) 54.2,91.183 54.317,91.3 56.075,91.3 56.594,91.819 59.206,91.819 v1(59.75,91.275) ; v1(65.775,91.276) 66.633,92.134 66.633,92.302 67.241,92.909 68.014,92.909 69.954,94.85 70.145,94.85 70.25,94.955 70.443,94.955 70.785,95.297 72.072,95.297 RN6.3@72.2,95.425